# EAGLE board OPNpool r4 (EAGLE 9.6.2)
AUTHOR_NAME: Johan Vonk; REV: 0.1
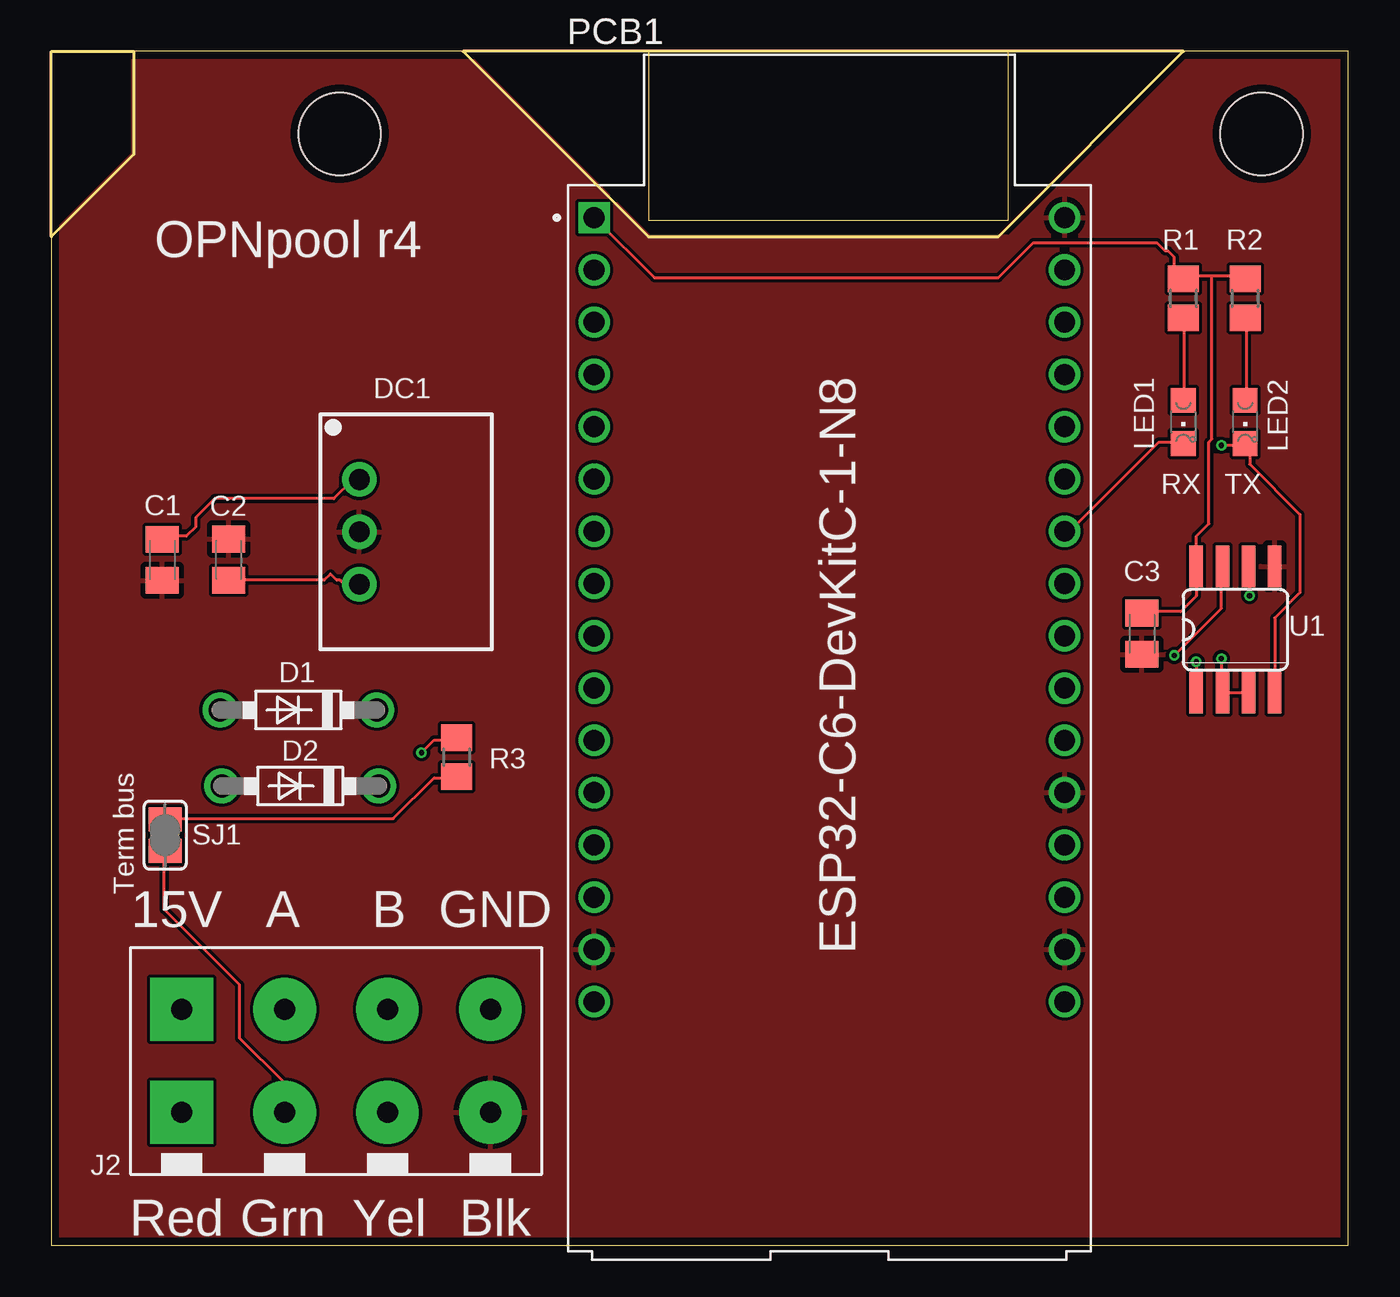
[diagram p0: board, top side]
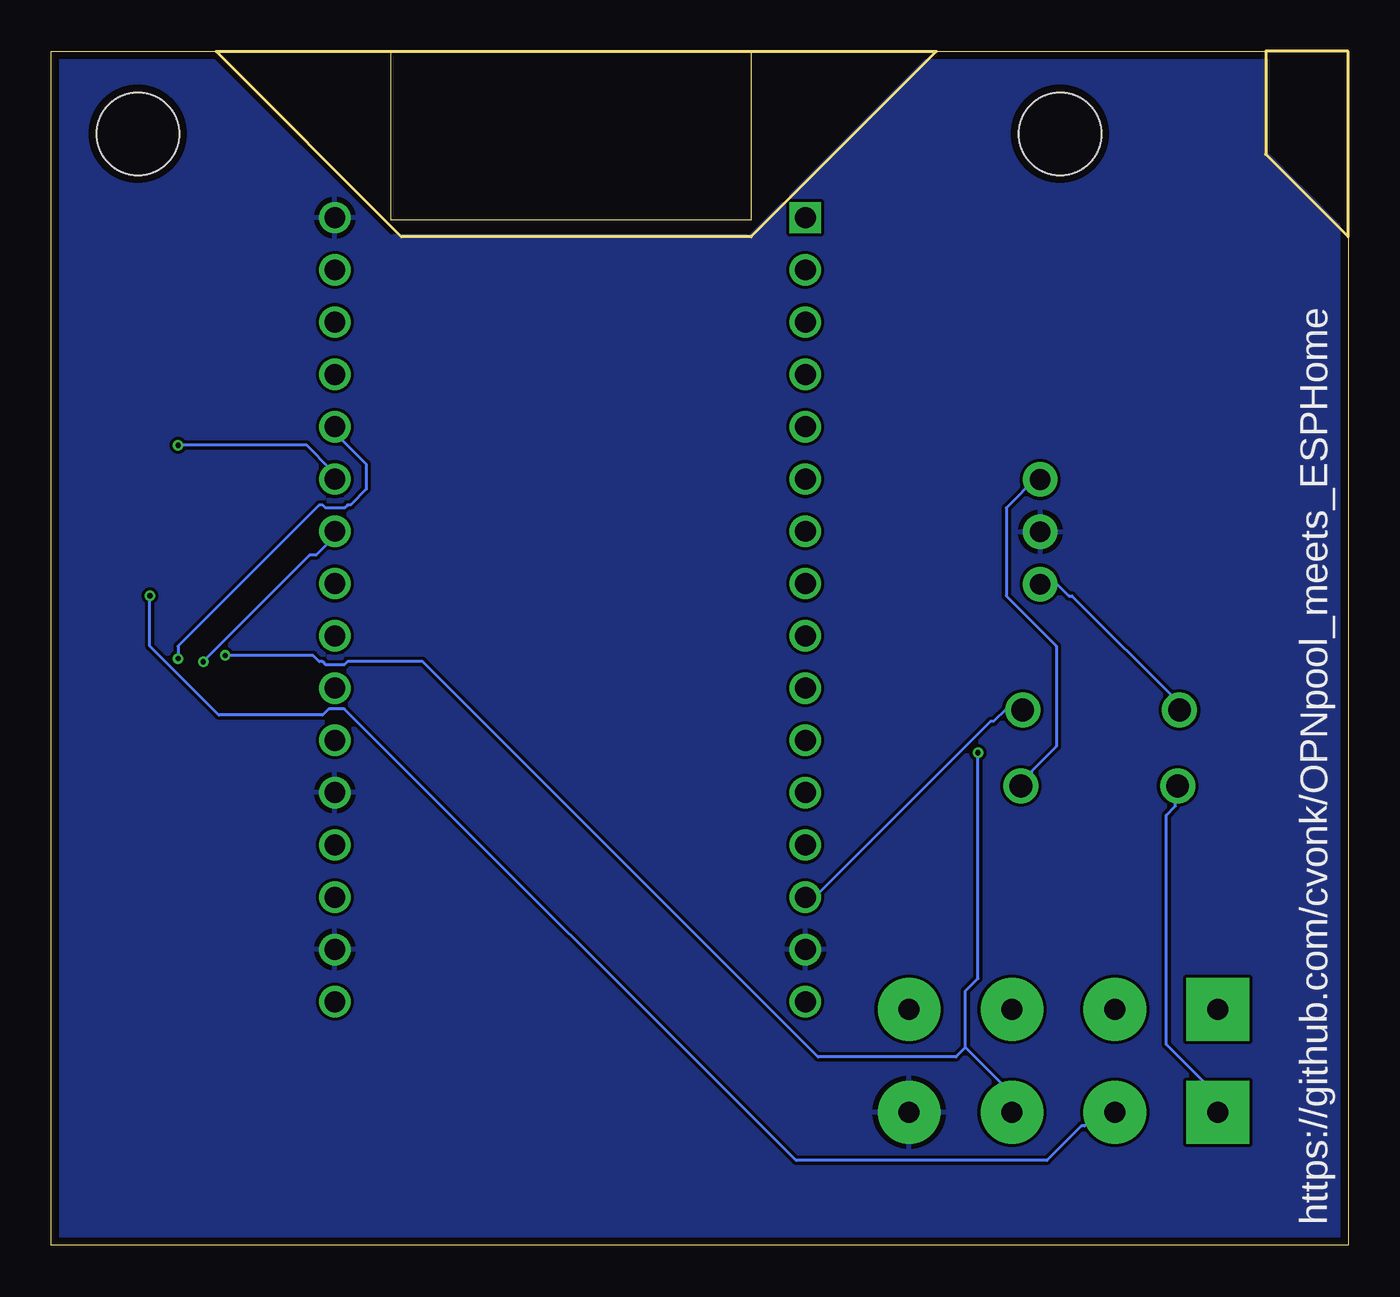
[diagram p1: board, bottom side, seen from below]

Size 63 x 58 mm. Coordinates in mm from the lower left corner, seen from the top.
Outline: 0,58 0,0 63,0 63,58 0,58
Copper layers (1*16): Top 0.035559375mm / dielectric 1.6mm / Bottom 0.035559375mm
Design rules "oshpark-2layer": minimum track width 6mil, minimum drill 10mil, track to track 6mil, track to pad 6mil, pad to pad 6mil, via to via 6mil, smd to smd 6mil, copper to edge 15mil, drill to drill 6mil, minimum pad ring 5mil, minimum via ring 5mil, stop-mask expansion 2.5mil, vias tented up to drill 0mil, thermal gap 10mil
Holes 4 mm at 14,54 58.8,54
tRestrict: area 29,50 to 47,58
bRestrict: area 29,50 to 47,58
Milling: area 29,49.8 to 46.5,58; 8 lines

## Footprints (pad centres in the part's own frame; a part is rotated, then mirrored left to right if it is on the bottom)
C0805K = smd 1.3 x 1.6: 1 -1,0; 2 1,0
DO41-7.6 = drill 1.1 pad 1.7: A 3.81,0; C -3.81,0
SIP3 = drill 1 pad 1.676: 1 -2.54,-2.54; 2 0,-2.54; 3 2.54,-2.54
SPTAF1/4-5,0-LL = drill 1.016 pad 3.048 square: 1 -7.713,-2.54; 1@1 -7.713,2.46 | drill 1.016 pad 3.048: 2 -2.713,-2.54; 2@1 -2.713,2.46; 3 2.287,-2.54; 3@1 2.287,2.46; 4 7.287,-2.54; 4@1 7.287,2.46
CHIPLED_0805 = smd 1.2 x 1.2: A 0,-1.05; C 0,1.05
MODULE_ESP32-C6-DEVKITC-1-N8 = drill 1.016 square: 3V3 -11.43,24.325 | drill 1.016: 5V0 -11.43,-8.695; !RST -11.43,21.785; GND -11.43,-11.235; GND@1 11.43,24.325; GND@2 11.43,-3.615; GND@3 11.43,-11.235; IO0 -11.43,9.085; IO1 -11.43,6.545; IO2 -11.43,-3.615; IO3 -11.43,-6.155; IO4 -11.43,19.245; IO5 -11.43,16.705; IO6 -11.43,14.165; IO7 -11.43,11.625; IO8 -11.43,4.005; IO9 11.43,-1.075; IO10 -11.43,1.465; IO11 -11.43,-1.075; IO12 11.43,-8.695; IO13 11.43,-6.155; IO15 11.43,16.705; IO16 11.43,21.785; IO17 11.43,19.245; IO18 11.43,1.465; IO19 11.43,4.005; IO20 11.43,6.545; IO21 11.43,9.085; IO22 11.43,11.625; IO23 11.43,14.165; NC1 -11.43,-13.775; NC2 11.43,-13.775
R0805 = smd 1.3 x 1.5: 1 -0.95,0; 2 0.95,0
SJ = smd 1.168 x 1.6: 1 -0.762,0; 2 0.762,0
SO08 = smd 0.66 x 2.032: 1 -1.905,-3.073; 2 -0.635,-3.073; 3 0.635,-3.073; 4 1.905,-3.073; 5 1.905,3.073; 6 0.635,3.073; 7 -0.635,3.073; 8 -1.905,3.073

## Placement (x,y rotation side)
C1  10uF mlcc 25V  [C0805K]  5.39,33.3 270 top
C2  10uF mlcc  [C0805K]  8.61,33.31 90 top
C3  0.1uF cer.  [C0805K]  52.99,29.71 270 top
D1  1N5818  [DO41-7.6]  12,26 180 top
D2  1N5818  [DO41-7.6]  12.09,22.31 180 top
DC1  R-78E5.0-0.5  [SIP3]  17.5,34.66 270 top
J2  RS485-TERM-SPTAF  [SPTAF1/4-5,0-LL]  14.04,8.99 0 top
LED1  RX  [CHIPLED_0805]  55,40 180 top
LED2  TX  [CHIPLED_0805]  58,40 180 top
PCB1  ESP32-C6-DEVKITC-1-N8  [MODULE_ESP32-C6-DEVKITC-1-N8]  37.8,25.6 0 top
R1  68Ω  [R0805]  55,46 90 top
R2  68Ω  [R0805]  58,46 90 top
R3  120Ω  [R0805]  19.69,23.71 270 top
SJ1  OPEN  [SJ]  5.52,19.92 270 top
U1  MAX3485CSA+  [SO08]  57.53,29.91 0 top

## Library data of the parts
C1 C2 = rcl; MANF: Murata Electronics; MANF#: GJ821BR61E106KE11L; MOUSER#: 81-GJ821BR61E106KE1L; SPICEPREFIX: C
C3 = rcl; MANF: KEMET; MANF#: C0805C104K1RECAUTO; MOUSER#: 80-C0805C104K1REAUTO; SPICEPREFIX: C
D1 D2 = Coert Vonk; MANF: Rectron; MANF#: 1N5818-T; MOUSER#: 583-1N5818-T
DC1 = Coert Vonk; MANF: RECOM Power; MANF#: R-78E5.0-0.5; MOUSER#: 919-R-78E5.0-0.5
J2 = Coert Vonk; MANF: Phoenix Contact; MANF#: 1864451; MOUSER#: 651-1864451
LED1 LED2 = OPNpool
PCB1 = Coert-Vonk
R1-R3 = rcl; MANF: Bourns; MANF#: CRM0805-JW-1R5ELF; MOUSER#: 652-CRM0805JW1R5ELF; SPICEPREFIX: R
SJ1 = jumper
U1 = Coert Vonk; MANF: Maxim Integrated; MANF#: MAX3485CSA+; MF: MAXIM; MOUSER#: 700-MAX3485CSA; MPN: MAX481CSA; OC_FARNELL: unknown; OC_NEWARK: 90C3817

## Nets
3V3: C3.1 PCB1.3V3 R1.2 R2.2 U1.8
15V: D2.A J2.1
A: J2.2 SJ1.2 U1.6
B: J2.3 R3.1 U1.7
GND: C1.2 C2.2 C3.2 DC1.2 J2.4 PCB1.GND PCB1.GND@1 PCB1.GND@2 PCB1.GND@3 U1.5
N$1: LED1.A R1.1
N$2: LED2.A R2.1
N$4: D1.C PCB1.5V0
N$5: R3.2 SJ1.1
RTS1: PCB1.IO23 U1.2 U1.3
RX1: LED1.C PCB1.IO21 U1.1
TX1: LED2.C PCB1.IO22 U1.4
VIN: C1.1 D2.C DC1.1
VOUT: C2.1 D1.A DC1.3

## Tracks (layer width: path | path; a pad name or v marks a point on that pad's centre or on a via)
3V3
  Top 0.152: 56.39,47.09 57.91,47.09 R2.2 | 56.39,47.09 55.02,47.09 R1.2 54.86,47.09 54.56,47.4 54.56,48.01 54.25,48.31 54.1,48.31 53.71,48.7 47.7,48.7 46,47 29.3,47 PCB1.3V3 | C3.1 53.03,30.79 54.86,30.79 55.63,31.55 55.63,32.92 U1.8 55.63,33.07 55.63,34.44 56.24,35.05 56.24,39.01 56.39,39.17 56.39,47.09
15V
  Bottom 0.152: D2.A 8.38,22.25 8.38,21.34 8.84,20.88 8.84,9.75 6.4,7.32 6.4,6.55 J2.1
A  (via drill 0.25)
  Top 0.152: SJ1.2 5.49,19.05 5.49,16.31 9.14,12.65 9.14,10.06 11.28,7.92 11.28,6.55 J2.2 | v58.22,31.55 58.22,32.92 U1.6
  Bottom 0.152: v58.22,31.55 58.22,29.11 54.86,25.76 49.84,25.76 49.53,26.06 48.77,26.06 26.82,4.12 14.63,4.12 12.95,5.79 12.8,5.79 12.19,6.4 11.43,6.4 J2.2
B  (via drill 0.25)
  Top 0.152: v17.98,23.93 18.59,24.54 19.66,24.54 R3.1 | v54.56,28.65 56.84,30.94 56.84,32.92 U1.7
  Bottom 0.152: v17.98,23.93 17.98,12.95 18.59,12.34 18.59,9.6 | 18.59,9.6 16.46,7.47 16.46,6.55 J2.3 | v54.56,28.65 50.29,28.65 49.99,28.35 49.84,28.35 49.68,28.19 48.77,28.19 48.62,28.35 44.96,28.35 25.76,9.14 19.05,9.14 18.59,9.6
GND
  pour Top: 0,0 0,49 4,53 4,58 20,58 29.1,48.9 29.2,49 46.4,49 46.5,48.9 55.4,57.8 55.4,58 63,58 63,0
  pour Bottom (isolate 0.016): 0,0 0,49 4,53 4,58 20,58 29.1,48.9 29.2,49 46.4,49 46.5,48.9 55.4,57.8 55.4,58 63,58 63,0
  pour Top (isolate 0.016): 0,0 0,49 4,53 4,58 20,58 29.1,48.9 29.2,49 46.4,49 46.5,48.9 55.4,57.8 63.15,57.8 63.15,0
N$1
  Top 0.152: LED1.A 55.02,41.15 55.02,44.96 R1.1
N$2
  Top 0.152: LED2.A 58.06,41.15 58.06,44.96 R2.1
N$4
  Bottom 0.152: PCB1.5V0 25.91,16.92 17.37,25.45 17.22,25.45 16.61,26.06 15.85,26.06 D1.C
N$5
  Top 0.152: R3.2 19.66,22.71 18.59,22.71 16.61,20.73 5.64,20.73 SJ1.1
RTS1  (via drill 0.25)
  Top 0.152: U1.3 58.06,26.82 57,26.82 U1.2 56.84,26.98 v56.84,28.5
  Bottom 0.152: v56.84,28.5 56.84,29.11 49.99,35.97 49.84,35.97 49.68,35.81 48.77,35.81 48.62,35.97 48.46,35.97 47.7,36.73 47.7,37.95 49.38,39.62 PCB1.IO23
RX1  (via drill 0.25)
  Top 0.152: LED1.C 54.86,39.01 53.8,39.01 49.38,34.59 PCB1.IO21 | v55.63,28.35 55.63,26.98 U1.1
  Bottom 0.152: v55.63,28.35 50.44,33.53 50.14,33.53 49.38,34.29 49.38,34.59 PCB1.IO21
TX1  (via drill 0.25)
  Top 0.152: v56.84,38.86 57.91,38.86 LED2.C 58.06,38.86 58.22,38.71 58.22,37.95 60.66,35.51 60.66,31.7 59.44,30.48 59.44,26.98 U1.4
  Bottom 0.152: v56.84,38.86 50.6,38.86 49.38,37.64 49.38,37.34 PCB1.IO22
VIN
  Top 0.152: C1.1 5.49,34.44 6.55,34.44 7.01,34.9 7.01,35.36 7.92,36.27 13.72,36.27 14.63,37.19 14.94,37.19 DC1.1
  Bottom 0.152: D2.C 15.85,22.4 15.39,22.86 15.39,23.01 14.17,24.23 14.17,29.11 16.61,31.55 16.61,35.81 15.09,37.34 DC1.1
VOUT
  Top 0.152: C2.1 8.69,32.31 13.26,32.31 13.56,32.61 13.87,32.31 14.02,32.31 14.17,32.16 14.94,32.16 DC1.3
  Bottom 0.152: D1.A 8.23,26.06 8.23,26.36 13.41,31.55 13.56,31.55 14.17,32.16 14.94,32.16 DC1.3

## Text on the board
tNames: OPNpool r4 | RX | TX | Term bus
bNames: https://github.com/cvonk/OPNpool_meets_ESPHome